# Altium PCB PCB1.PcbDoc
Units mm, origin at the board's own origin, x right, y up, seen from the top; angles counter-clockwise.
Board outline 12.19 x 21.21 mm, 2 copper layers (Top Layer, Bottom Layer); 9 components, 7 nets, 31 pads, 10 vias.
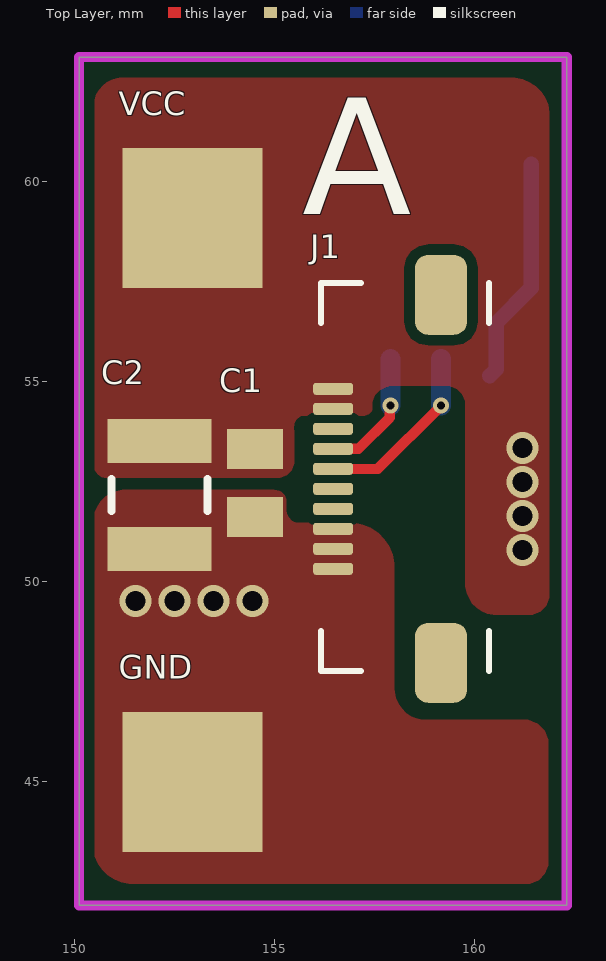
[diagram p0: Top Layer view]
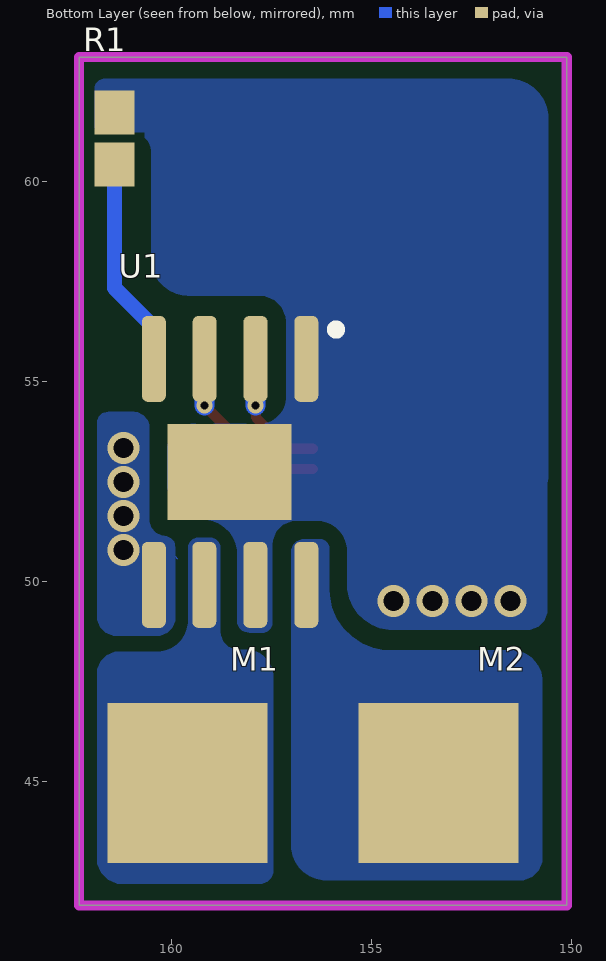
[diagram p1: Bottom Layer view, seen from below]

## Layer stack, top to bottom
Top Solder: solder mask 0.0102, Solder Resist, Dk 3.5
Top Layer: signal copper 0.0356
Dielectric 1: dielectric 0.32, FR-4, Dk 4.8
Bottom Layer: signal copper 0.0356
Bottom Solder: solder mask 0.0102, Solder Resist, Dk 3.5

## Board outline
150.114,41.91 162.306,41.91 162.306,63.119 150.114,63.119

## Design rules (kind name [scope] priority, off if disabled: settings)
Clearance [All] p1: gap=0.254 ignorepadtopadclearanceinfootprint=FALSE except(0: Arc-Arc Arc-Track Arc-SMDPad Arc-THPad Arc-Hole Track-Track Track-SMDPad Track-THPad Track-Hole SMDPad-SMDPad SMDPad-THPad SMDPad-Hole THPad-THPad THPad-Hole Via-Hole Fill-Hole Poly-Hole Region-Hole Text-Hole)
PlaneConnect [All] p1: planeconnectstyle=Direct reliefexpansion=0.508 reliefentries=4 reliefconductorwidth=0.254 reliefairgap=0.254
PolygonConnect [All] p1: connectstyle=Direct reliefconductorwidth=0.254 reliefentries=4 polygonreliefangle="90 Angle" airgapwidth=0.254
RoutingVias [All] p1: holewidth=0.711 width=1.27 viastyle="Through Hole" minholewidth=0.711 minwidth=1.27 maxholewidth=0.711 maxwidth=1.27
SolderMaskExpansion [All] p1: expansion=0.102 istentingtop=FALSE
Width [All] p1: maxlimit=0.762 minlimit=0.254 preferedwidth=0.508 toplayer_maxwidth=0.254 toplayer_prefwidth=0.254 minimp=50.000000 maximp=50.000000 favimp=50.000000
29 further rules are at their usual default settings.

## Components (designator, comment, footprint, x,y, rotation, side; value= is the part's Value field where it differs from the comment)
C1 "0.1uF" C0805 154.5,52.475 r90 top
C2 "47uF" C1210 152.125,52.175 r90 top
GND "Ground Pad" PAD_ALIMENTAÇÃO_MINI 152.95,45 r0 top (schematic designator GND1)
J1 "505278-1033" FPC_CON 158.064,52.574 r90 top
M1 "Motor Pad" PAD_MOTOR_MINI 159.6,44.975 r180 bottom
M2 "Motor Pad" PAD_MOTOR_MINI 153.325,44.975 r180 bottom
R1 "30kOhms" RESC1608X55N 161.417,61.087 r90 bottom
U1 "DRV8871DDA" SO-PowerPad-8(8_pins) 158.55,52.75 r270 bottom
VCC "Source Pad" PAD_ALIMENTAÇÃO_MINI 152.95,59.1 r0 top (schematic designator VCC1)

## Footprints (in the part's own frame and the unit in brackets; to place one, negate y for a bottom-side part, rotate by r counter-clockwise, add the part's x,y. Pads: shape width x height; smd on the part's side, far side on the other; paste and mask are expansions set on the pad)
C0805 [mm]
  rect 1x1.4 smd: 1(-0.85,-0.008) 2(0.85,-0.008)
  body extent -1.07,-0.68 1.07,0.67, height 0.9
C1210 [mm] "Chip Capacitor, Body 3.2x2.5mm, IPC High Density"
  rect 1.1x2.6 smd: 1(-1.35,0) 2(1.35,0)
  silkscreen extent -0.4,-1.2 0.4,1.2, body extent -1.7,-1.35 1.7,1.35, height 1.3
FPC_CON [mm] "Small Outline IC (SOIC), 1.27 mm pitch; 8 pin, 4.90 mm L X 3.90 mm W X 1.75 mm H body"
  rrect50% 0.3x1 smd: 1(-2.25,1.6) 2(-1.75,1.6) 3(-1.25,1.6) 4(-0.75,1.6) 5(-0.25,1.6) 6(0.25,1.6) 7(0.75,1.6) 8(1.25,1.6) 9(1.75,1.6) 10(2.25,1.6)
  rrect50% 2x1.3 smd: MP1(-4.6,-1.1) MP2(4.6,-1.1)
  silkscreen extent -4.8,-2.3 4.9,1.9, body extent -5.25,-3.5 5.25,1.8, height 1.88
PAD_ALIMENTAÇÃO_MINI [mm]
  rect 3.5x3.5 smd: A(0,0)
PAD_MOTOR_MINI [mm]
  rect 4x4 smd: M(0,0)
RESC1608X55N [mm]
  rect 1.1x1 smd: 1(-0.65,0) 2(0.65,0)
  body extent -0.8,-0.4 0.8,0.4, height 0.55
SO-PowerPad-8(8_pins) [mm]
  rrect50% 2.15x0.6 smd: 1(-2.825,1.925) 2(-2.825,0.655) 3(-2.825,-0.615) 4(-2.825,-1.885) 5(2.825,-1.885) 6(2.825,-0.625) 7(2.825,0.65) 8(2.825,1.925)
  rect 2.4x3.1 smd: 9(0,0)
  silkscreen extent -3.66,2.57 -3.45,2.77, body extent -3,-2.45 3,2.45, height 1.7

## Part data
C1: library part C0805C104M3RACTU, "CAP CER 100nF 25V X7R 0805", Manufacturer=Kemet, Operating Temperature="-55 C ~ 125 C", Package / Case="0805(2012 mestric)", Supplier Part Number 1=80-C0805C104M3R, Tolerance=20%, Voltage - Rated="25 VDC", Category="Ceramic Capacitor", ComponentLink1Description=Datasheet, ComponentLink1URL=https://br.mouser.com/datasheet/2/212/KEM_C1002_X7R_SMD-1102033.pdf, ComponentLink2Description="Mouser Link", ComponentLink2URL=https://br.mouser.com/ProductDetail/KEMET/C0805C104M3RACTU?qs=jbCUrP3sAgSIdMuvv9W4Pg%3D%3D, Dieletric=X7R, ESR=-, Library Control - Checked Footprint=Yes, Library Control - Checked Schematic=Yes, Library Control - Last Update=25/08/22, Library Control - Person that Checked Footprint=Cage, Library Control - Person that Checked Schematic=Cage, Library Control - Person that did the Last Update Footprint=Cage, Library Control - Person that did the Last Update Schematic=Cage, Library Ref=Capacitor, Part Number=C0805C104M3RACTU, Price="1=0,13 10=0,064 100=0,037 1000=0,025 (USD)", Size / Dimension="1.25 mm W x 2 mm L x 0.78 mm H", Supplier 1=Mouser
C2: library part GRM32EC81C476KE15K, "CAP CER 47uF 16V X6S 1210", Manufacturer=Murata, Operating Temperature="-55°C ~ 105°C", Package / Case="1210 (3225 metric)", Supplier Part Number 1=81-GRM32EC81C476KE5K, Tolerance=10%, Voltage - Rated=16V, Category="Ceramic Capacitor", ComponentLink1Description=Datasheet, ComponentLink1URL=https://br.mouser.com/datasheet/2/281/1/GRM32EC81C476KE15_01A-1988154.pdf, ComponentLink2Description="Mouser Link", ComponentLink2URL=https://br.mouser.com/ProductDetail/Murata-Electronics/GRM32EC81C476KE15K?qs=pba5EUA0Y0ZfNhWUOosFbg%3D%3D, Dieletric=X6S, ESR=-, Library Control - Checked Footprint=Yes, Library Control - Checked Schematic=Yes, Library Control - Last Update=22/08/22, Library Control - Person that Checked Footprint=Cage, Library Control - Person that Checked Schematic=Cage, Library Control - Person that did the Last Update Footprint=Prisma, Library Control - Person that did the Last Update Schematic=Prisma, Library Ref=Capacitor, Part Number=GRM32EC81C476KE15K, Price="1=0,59 10=0,314 100=0,274 (USD)", Size / Dimension="3.2mm x 2.5mm x 2.5mm", Supplier 1=Mouser
GND: library part "Ground Pad Mini Sumô", "GND PAD MINI SUMÔ", Cable AWG="20 / 18 (AWG)", Library Ref=Pads, Recomended Category="Mini Sumô", Size="3.5 x 3.5 (mm)"
J1: library part 505278-1033_BODY, "CONN FFC/FPC HORZ 10POS 0.50MM", Current Rating (Amps)=500mA, Manufacturer=Molex, Operating Temperature="-40°C ~ 85°C", Supplier Part Number 1=538-505278-1033, Category=Connectors, ComponentLink1Description=Datasheet, ComponentLink1URL=https://br.mouser.com/datasheet/2/276/2/5052781033_FFC_FPC_CONNECTORS-772019.pdf, ComponentLink2Description="Mouser Link", ComponentLink2URL=https://br.mouser.com/ProductDetail/Molex/505278-1033?qs=c8NFF48pVsDStgrQCBOSTg%3D%3D, Contact Length - Mating=0.50mm, Contact Material=Tin, Contact Type=FFC/FPC, Insulation Material="Liquid Crystal Polymer", Library Control - Checked Footprint=Yes, Library Control - Checked Schematic=Yes, Library Control - Last Project that Used=Follow-Final, Library Control - Last Update="24/04/2021 00:25", Library Control - Person that Checked Footprint=Lucas, Library Control - Person that Checked Schematic=Lucas, Library Control - Person that did the Last Update Footprint=Mateus(Dimas), Library Control - Person that did the Last Update Schematic=Mateus(Dimas), Library Ref=Connectors, Mounting Type="Right Angle", Number of Positions=10, Number of Rows=1, Part Number=505278-1033, Pitch=0.50mm, Price="1=0,51000, 10=0,42900, 100=0,33400 (USD)", Supplier 1=Mouser, Termination=SMD
M1 M2: library part "Motor Pad Mini Sumô", "MOTOR PAD MINI SUMÔ", Cable AWG="20 / 18 (AWG)", Library Ref=Pads, Recomended Category="Mini Sumô", Size="3.5 x 3.5 (mm)"
R1: library part RC0603FR-0730KL, "RES SMD 30 kOHMS 1% 1/10W 0603", Manufacturer=YAGEO, Operating Temperature="- 55°C ~ 155°C", Package / Case="0603 (1608 Metric)", Power Rating="100 mW (1/10 W)", Resistor Type=Fixo, Supplier Part Number 1=603-RC0603FR-0730KL, Temperature Coefficient="100 PPM / C", Tolerance="1 %", Voltage Rating="50 V", Category="Thick Film Resistors - SMD", ComponentLink1Description="Mouser Link", ComponentLink1URL=https://br.mouser.com/ProductDetail/YAGEO/RC0603FR-0730KL?qs=diQw95jMAeNFr44yr782FQ%3D%3D, ComponentLink2Description=Datasheet, ComponentLink2URL=https://br.mouser.com/datasheet/2/447/Yageo_03_18_2021_PYu_RC_Group_51_RoHS_L_11-2199992.pdf, Library Control - Checked Footprint=Yes, Library Control - Checked Schematic=Yes, Library Control - Last Update="24/07/2021 11:34", Library Control - Person that Checked Footprint=Guilherme, Library Control - Person that Checked Schematic=Guilherme, Library Control - Person that did the Last Update Footprint=Guilherme, Library Control - Person that did the Last Update Schematic=Guilherme, Library Ref=Resistor, Part Number=RC0603FR-0730KL, Price="1=0,10, 10=0,024, 100=0,01(USD)", Size / Dimension="1,6 L x 0,8 W x 0,45 H", Supplier 1=Mouser
U1: "IC MTR DRV (6.5V ~ 45V) (3.5 A) SO-PowerPad-8", Current - Output=3.5A, Current - Peak Output (Source, Sink)="3.6A / 3.6A", Logic Voltage - VIL, VIH="VIL=0.5V / VIH=1.5V", Manufacturer="Texas Instruments", Operating Supply Current=3mA, Operating Temperature="-40°C ~ 125°C", Package / Case=SO-PowerPad-8, Power Dissipation="Irms^2 (HighSide Rds(On) + LowSide Rds(On))", Rds On - Drain-Source Resistance="565m ohm", Suplier Part Number 1=595-DRV8871DDA, Voltage - Load="(6.5V ~ 45V)", Category=Driver, ComponentLink1Description="Mouser Link / ST Link", ComponentLink1URL=https://br.mouser.com/ProductDetail/Texas-Instruments/DRV8871DDA?qs=Fobv33ltQGiluwfB07aSBw%3D%3D, ComponentLink2Description=Datasheet, ComponentLink2URL=https://www.ti.com/lit/ds/symlink/drv8871.pdf?HQS=dis-mous-null-mousermode-dsf-pf-null-wwe&ts=1623013148488&ref_url=https%253A%252F%252Fwww.google.com%252F, Library Control - Checked Footprint=Yes, Library Control - Checked Schematic=Yes, Library Control - Last Update="12/06/2021 17:04", Library Control - Person that Checked Footprint="Stéfany (Ster)", Library Control - Person that Checked Schematic="Stéfany (Ster)", Library Control - Person that did the Last Update Footprint="Maria Laura", Library Control - Person that did the Last Update Schematic="Stéfany (Ster)", Library Ref=Driver, Logic (IN-SD/High Low)=IN-SD, Output Configuration="Half Bridge (2)", Part Number=DRV8871DDA, Price="1=3,15000, 10=2,84000, 100=2,31000 (USD)", Supplier 1=Mouser, Technology="Power MOSFET", Voltage - Supply="(6.5V ~ 45V)"
VCC: library part "Source Pad Mini Sumô", "VCC PAD MINI SUMÔ", Cable AWG="20 / 18 (AWG)", Library Ref=Pads, Recomended Category="Mini Sumô", Size="3.5 x 3.5 (mm)"

## Via types
v1: diameter 0.8, hole 0.5, Top Layer to Bottom Layer, tented both sides, 8 vias
v2: diameter 0.4, hole 0.2, Top Layer to Bottom Layer, tented both sides, 2 vias

## Nets (pads, with @x,y where several pads share a name; then routed paths per layer and width w, separated by ;. In a path a pad name is that pad's centre, name@x,y a point inside that pad or via, vN(x,y) a via of type N, cw(c..) or ccw(c..) an arc to the next point about the centre after c; other vN are vias at no path point)
GND: C1.1 C2.1 GND.A J1.1 J1.2 J1.3 R1.2 U1.1 U1.7 U1.9
  other v1: 151.525,49.525 152.5,49.525 153.475,49.525 154.45,49.525
ILIM: R1.1 U1.4 | length 5.7
  Bottom Layer w0.381: U1.4@160.381,55.149 160.544,55.313 160.544,56.469 161.417,57.342 R1.1
IN1: J1.6 U1.3 | length 4.5
  Top Layer w0.254: J1.6 157.585,52.824 v2(159.165,54.404)
  Bottom Layer w0.5: v2(159.165,54.404) U1.3
IN2: J1.7 U1.2 | length 3.2
  Top Layer w0.254: J1.7 J1.7 157.1,53.325 157.88,54.105 157.88,54.389 v2(157.895,54.404)
  Bottom Layer w0.5: v2(157.895,54.404) U1.2
OUT1: M1.M U1.6
OUT2: M2.M U1.8
VM: C1.2 C2.2 J1.9 J1.10 U1.5 VCC.A
  other v1: 161.2,50.8 161.2,51.65 161.2,52.5 161.2,53.35
pads on no net: J1.4 J1.5 J1.8 J1.MP1 J1.MP2
copper on no net: | length 0.8
  Bottom Layer w0.635: 500,54.356 500.762,54.356

## Polygon pours and split planes (outlines as drawn)
OUT2 on Bottom Layer "OUT2_L02_P032" (solid, pour order 32): 156.675,51.063 cw(c156.675,50.738) 157,50.738 157,43.413 cw(c156.125,43.413) 156.125,42.538 151.3,42.538 cw(c151.3,43.113) 150.725,43.113 150.725,47.513 cw(c151.5,47.513) 151.5,48.288 154.525,48.288 ccw(c154.525,49.813) 156.05,49.813 156.05,50.838 cw(c156.275,50.838) 156.275,51.063
GND on Bottom Layer "GND_L02_P033" (solid, pour order 33): 156.7,51.7 156.35,51.525 ccw(c156.35,50.775) 155.6,50.775 155.6,49.925 cw(c154.463,49.937) 154.45,48.8 151.125,48.8 cw(c151.125,49.325) 150.6,49.325 150.6,52.675 ccw(c150.575,52.675) 150.575,52.7 cw(c151.15,52.7) 151.15,53.275 152.95,53.275
GND on Bottom Layer "GND_L02_P031" (solid, pour order 31): 158.35,49.025 cw(c158.05,49.025) 158.05,48.725 157.725,48.725 cw(c157.725,48.975) 157.475,48.975 157.475,50.925 ccw(c156.875,50.925) 156.875,51.525 151.75,51.525 cw(c151.75,52.7) 150.575,52.7 150.575,61.575 cw(c151.575,61.575) 151.575,62.575 161.65,62.575 cw(c161.65,62.3) 161.925,62.3 161.925,61.4 cw(c161.725,61.4) 161.725,61.2 160.925,61.2 ccw(c160.925,60.775) 160.5,60.775 160.5,58.126 cw(c159.563,58.087) 159.601,57.15 157.775,57.15 ccw(c157.775,56.5) 157.125,56.5 157.125,54.625 ccw(c157.8,54.625) 157.8,53.95 159.45,53.95 cw(c159.45,53.3) 160.1,53.3 160.1,52.45 cw(c159.2,52.45) 159.2,51.55 ccw(c159.2,50.7) 158.35,50.7 158.35,50.55
VM on Bottom Layer "VM_L02_P030" (solid, pour order 30): 159.9,49.125 ccw(c160.375,49.125) 160.375,48.65 161.35,48.65 ccw(c161.35,49.15) 161.85,49.15 161.85,53.975 ccw(c161.575,53.975) 161.575,54.25 160.925,54.25 ccw(c160.962,53.838) 160.55,53.8 160.55,51.575 cw(c160.15,51.55) 160.175,51.15 ccw(c160.2,50.85) 159.9,50.825
OUT1 on Bottom Layer "OUT1_L02_P029" (solid, pour order 29): 158.775,48.75 cw(c158.325,48.75) 158.325,48.3 158.125,48.3 ccw(c158.125,47.625) 157.45,47.625 157.45,42.8 ccw(c157.8,42.8) 157.8,42.45 161.225,42.45 ccw(c161.225,43.075) 161.85,43.075 161.85,47.7 ccw(c161.3,47.7) 161.3,48.25 160.375,48.25 cw(c160.375,49.05) 159.575,49.05 159.575,50.85 ccw(c159.325,50.85) 159.325,51.1 159.025,51.1 ccw(c159.025,50.85) 158.775,50.85
no net on Bottom Layer "NONET_L02_P019" (solid, pour order 19): 159.85,50.582 159.893,50.624
GND on Top Layer "GND_L01_P027" (solid, pour order 27): 155.6,51.475 cw(c155.6,51.775) 155.3,51.775 155.3,52 ccw(c155,52) 155,52.3 151.275,52.3 ccw(c151.275,51.5) 150.475,51.5 150.475,43.425 ccw(c151.45,43.425) 151.45,42.45 161.275,42.45 ccw(c161.275,43.025) 161.85,43.025 161.85,45.925 ccw(c161.225,45.925) 161.225,46.55 158.775,46.55 cw(c158.775,47.325) 158,47.325 158,50.35 ccw(c156.875,50.35) 156.875,51.475
VM on Top Layer "VM_L01_P025" (solid, pour order 25): 150.5,54.15 150.5,52.975 ccw(c150.812,52.912) 150.75,52.6 155.05,52.6 ccw(c155.05,53.05) 155.5,53.05 155.5,53.775 cw(c155.781,53.869) 155.687,54.15 157.2,54.15 ccw(c157.2,54.425) 157.475,54.425 cw(c157.95,54.425) 157.95,54.9 159.3,54.9 cw(c159.3,54.425) 159.775,54.425 159.775,49.95 ccw(c160.55,49.95) 160.55,49.175 161.35,49.175 ccw(c161.35,49.7) 161.875,49.7 161.875,61.65 ccw(c160.925,61.65) 160.925,62.6 151.125,62.6 ccw(c151.187,61.913) 150.5,61.85

## Keep-outs
Keep-Out Layer:
  the board outline again, w0.254

## Silkscreen, mask and mechanical layers (free items; w line width, h text height)
Top Overlay:
  text "A" at 155.7,58.23 h5
BoardOutLine:
  the board outline again, w0.254